# Altium PCB discovery_shield.PcbDoc (part 1 of 2)
Units mm, origin at the board's own origin, x right, y up, seen from the top; angles counter-clockwise.
Board outline 147.5 x 100.12 mm, 2 copper layers (Top Ground, Bottom Ground); 77 components, 41 nets, 312 pads, 78 vias.
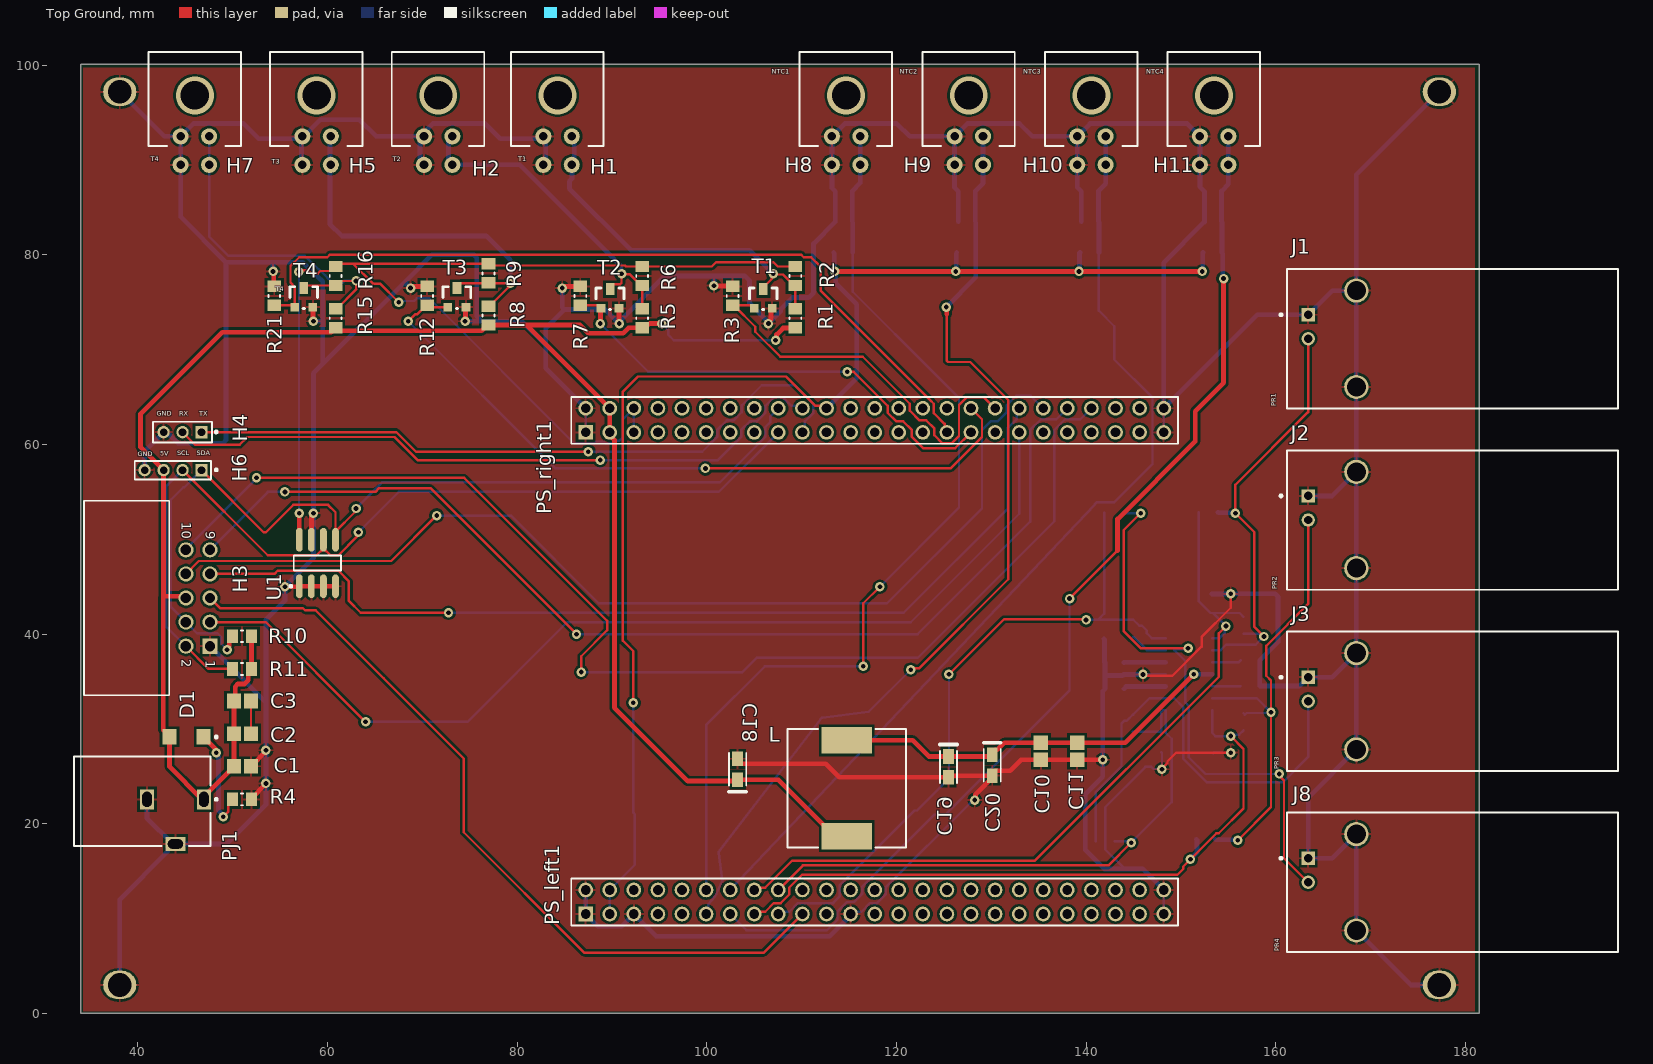
[diagram p0: Top Ground view]
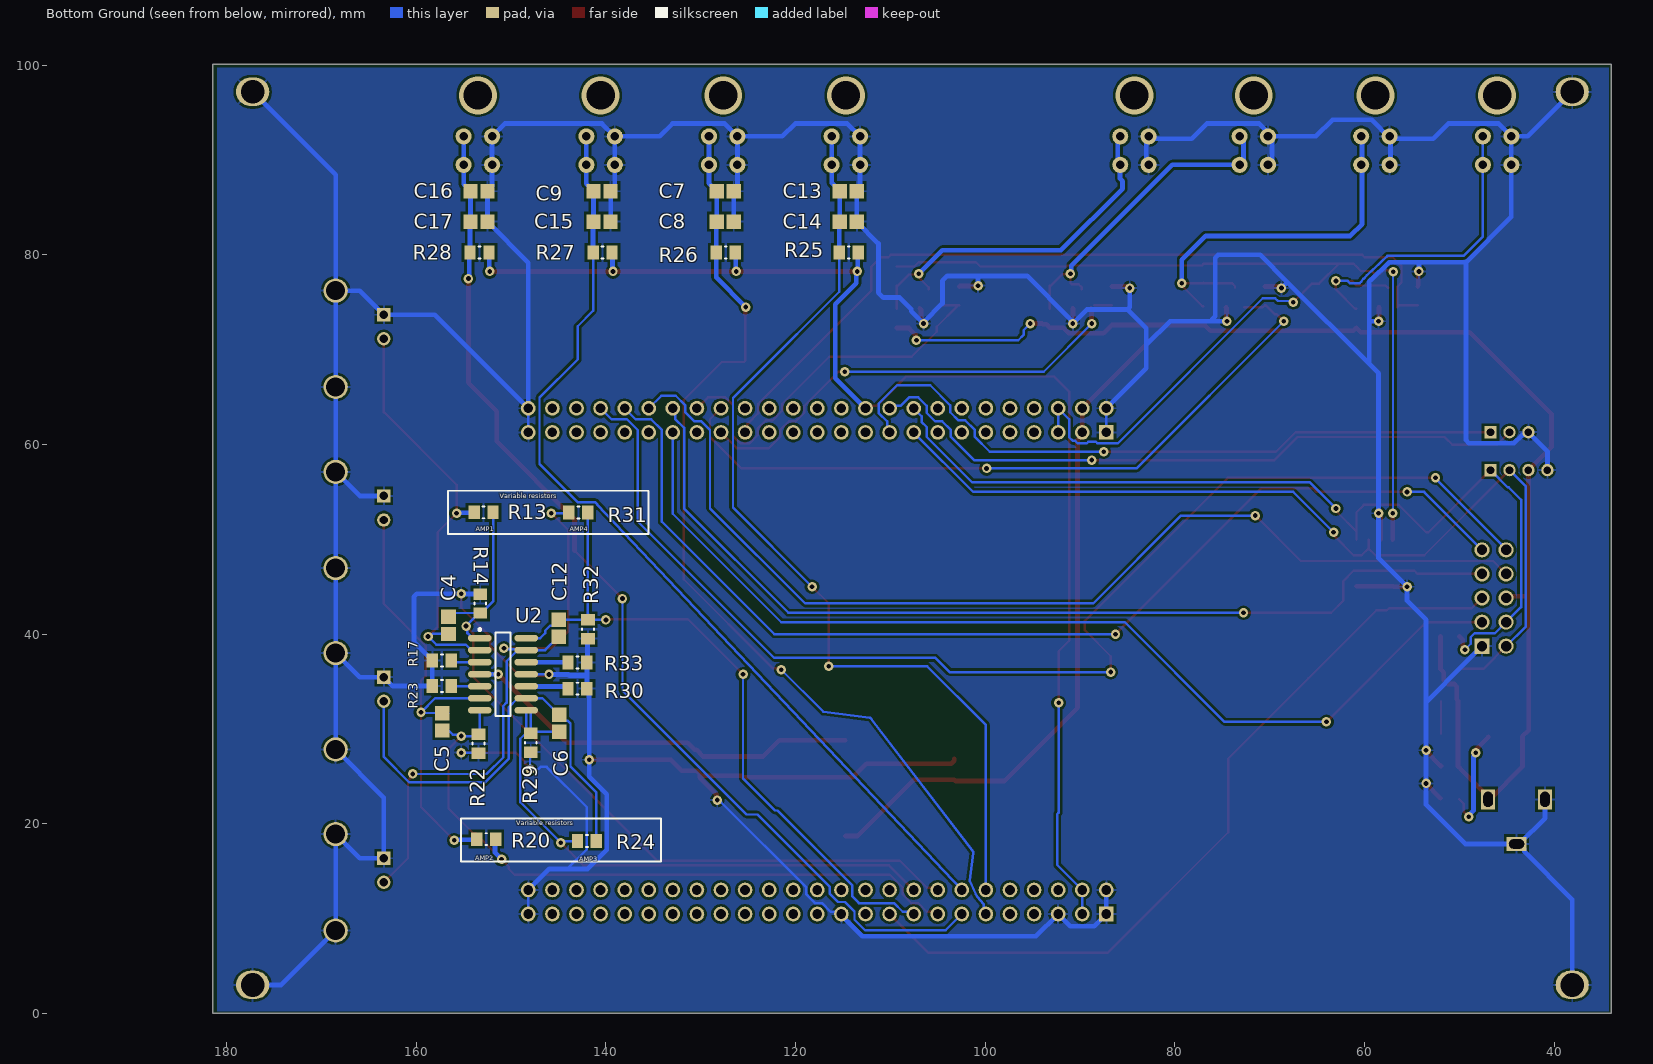
[diagram p1: Bottom Ground view, seen from below]
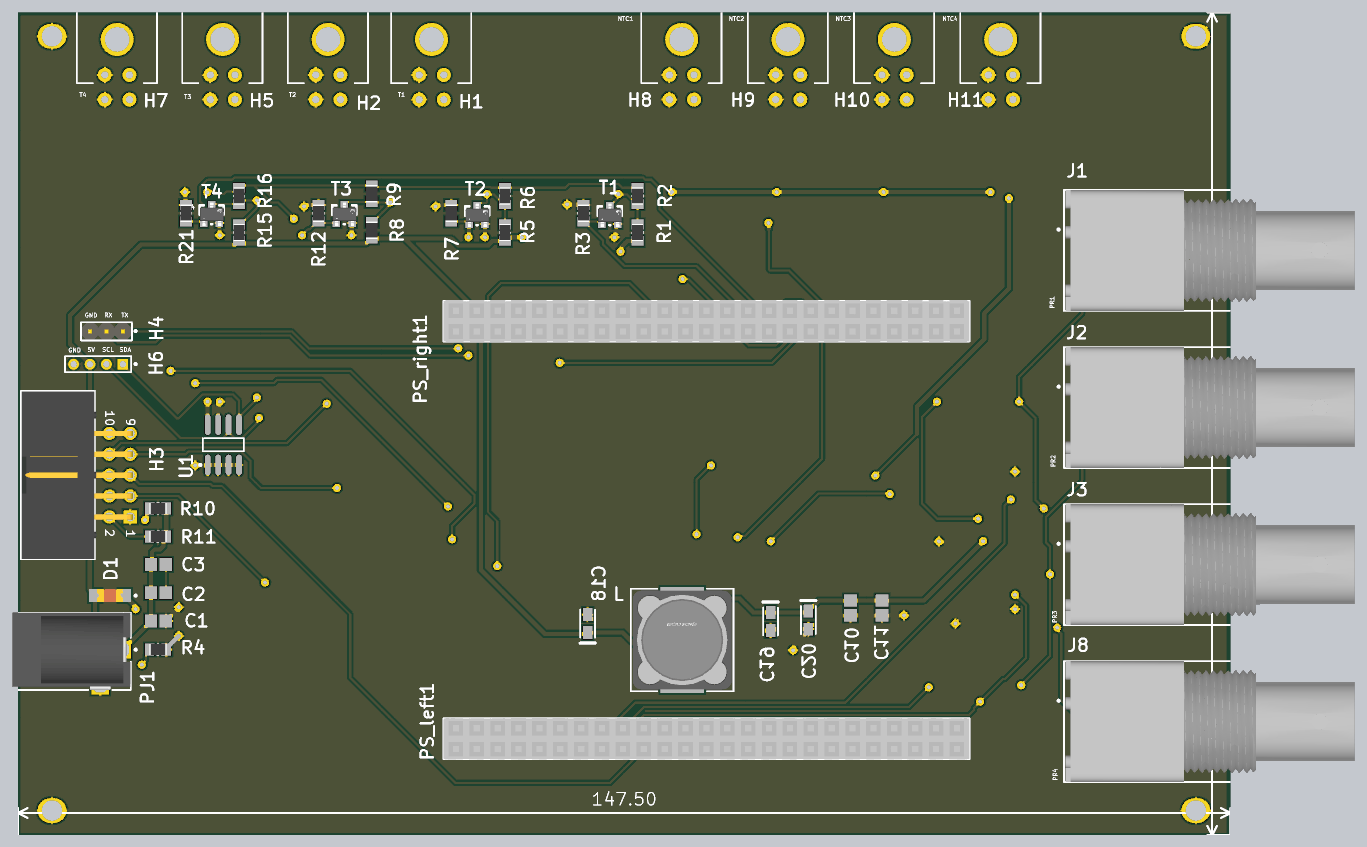
[diagram p2: 3D render of the assembled board from above, using the file's embedded part models]
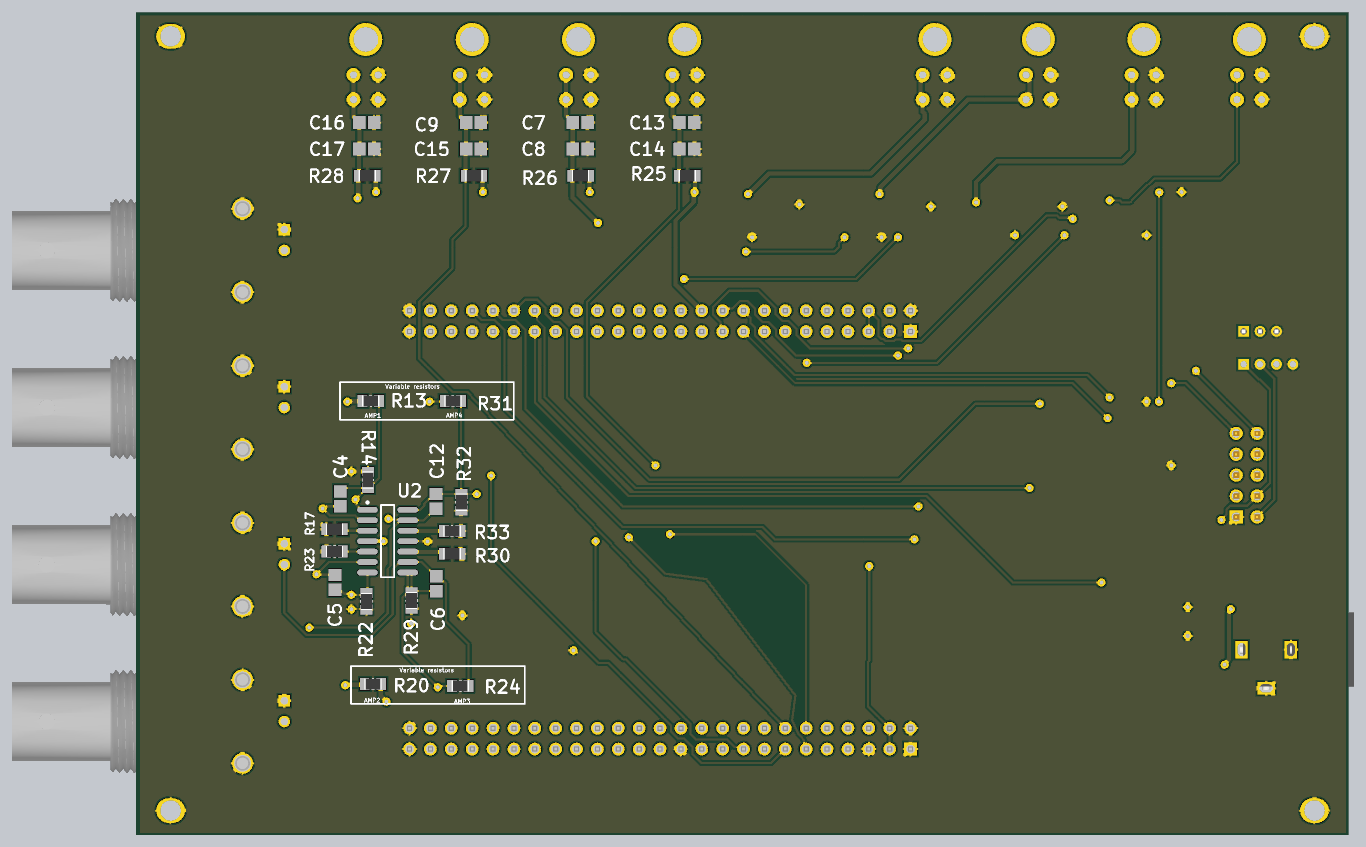
[diagram p3: 3D render of the assembled board from below, using the file's embedded part models]

## Layer stack, top to bottom
Top Solder: solder mask 0.0102, Solder Resist, Dk 3.5
Top Ground: signal copper 0.0356
Dielectric 1: dielectric 0.32, FR-4, Dk 4.8
Bottom Ground: signal copper 0.0356
Bottom Solder: solder mask 0.0102, Solder Resist, Dk 3.5

## Board outline
33.95,0 181.45,0 181.45,100.125 33.95,100.125

## Design rules (kind name [scope] priority, off if disabled: settings)
Clearance [All] p1: gap=0.254 ignorepadtopadclearanceinfootprint=FALSE except(0: Arc-Hole Track-Hole SMDPad-Hole THPad-Hole Via-Hole Fill-Hole Poly-Hole Region-Hole Text-Hole)
DiffPairsRouting [All] p1: maxlimit=0.254 minlimit=0.254 mostfreqgap=0.254 substack1={D1B1C374-4C5A-4695-9EA5-56BB1ECA9717} toplayer_{d1b1c374-4c5a-4695-9ea5-56bb1eca9717}_minwidth=0.381 toplayer_{d1b1c374-4c5a-4695-9ea5-56bb1eca9717}_maxwidth=0.381 toplayer_{d1b1c374-4c5a-4695-9ea5-56bb1eca9717}_prefwidth=0.381 bottomlayer_{d1b1c374-4c5a-4695-9ea5-56bb1eca9717}_minwidth=0.381 bottomlayer_{d1b1c374-4c5a-4695-9ea5-56bb1eca9717}_maxwidth=0.381 bottomlayer_{d1b1c374-4c5a-4695-9ea5-56bb1eca9717}_prefwidth=0.381 toplayer_minwidth=0.381 toplayer_maxwidth=0.381 toplayer_prefwidth=0.381 bottomlayer_minwidth=0.381 bottomlayer_maxwidth=0.381 bottomlayer_prefwidth=0.381 substack2={5FBC7BDE-A7E4-4D81-87A5-A691E1B52501} toplayer_{5fbc7bde-a7e4-4d81-87a5-a691e1b52501}_minwidth=0.381 toplayer_{5fbc7bde-a7e4-4d81-87a5-a691e1b52501}_maxwidth=0.381 toplayer_{5fbc7bde-a7e4-4d81-87a5-a691e1b52501}_prefwidth=0.381 bottomlayer_{5fbc7bde-a7e4-4d81-87a5-a691e1b52501}_minwidth=0.381 bottomlayer_{5fbc7bde-a7e4-4d81-87a5-a691e1b52501}_maxwidth=0.381 bottomlayer_{5fbc7bde-a7e4-4d81-87a5-a691e1b52501}_prefwidth=0.381 substack3={A1F965BF-F005-4EF8-922E-463639412966} toplayer_{a1f965bf-f005-4ef8-922e-463639412966}_minwidth=0.381 toplayer_{a1f965bf-f005-4ef8-922e-463639412966}_maxwidth=0.381 toplayer_{a1f965bf-f005-4ef8-922e-463639412966}_prefwidth=0.381 bottomlayer_{a1f965bf-f005-4ef8-922e-463639412966}_minwidth=0.381 bottomlayer_{a1f965bf-f005-4ef8-922e-463639412966}_maxwidth=0.381 bottomlayer_{a1f965bf-f005-4ef8-922e-463639412966}_prefwidth=0.381 substack4={1C97A577-5376-477D-B455-A2ED0DC39C65} toplayer_{1c97a577-5376-477d-b455-a2ed0dc39c65}_minwidth=0.381 toplayer_{1c97a577-5376-477d-b455-a2ed0dc39c65}_maxwidth=0.381 toplayer_{1c97a577-5376-477d-b455-a2ed0dc39c65}_prefwidth=0.381 bottomlayer_{1c97a577-5376-477d-b455-a2ed0dc39c65}_minwidth=0.381 bottomlayer_{1c97a577-5376-477d-b455-a2ed0dc39c65}_maxwidth=0.381 bottomlayer_{1c97a577-5376-477d-b455-a2ed0dc39c65}_prefwidth=0.381 substack5={2A62406C-F507-4D0A-A64A-133965886188} toplayer_{2a62406c-f507-4d0a-a64a-133965886188}_minwidth=0.381 toplayer_{2a62406c-f507-4d0a-a64a-133965886188}_maxwidth=0.381 toplayer_{2a62406c-f507-4d0a-a64a-133965886188}_prefwidth=0.381 bottomlayer_{2a62406c-f507-4d0a-a64a-133965886188}_minwidth=0.381 bottomlayer_{2a62406c-f507-4d0a-a64a-133965886188}_maxwidth=0.381 bottomlayer_{2a62406c-f507-4d0a-a64a-133965886188}_prefwidth=0.381 maxuncoupledlength=12.7
HoleSize [All] p1: absolutevalues=TRUE maxlimit=2.54 minlimit=0.5 maxpercent=80.000 minpercent=20.000
PolygonConnect PolygonConnect_2 [All vs IsNamedPolygon('NONET_L01_P002')] p1: thpad.connectstyle=Relief thpad.reliefconductorwidth=0.254 thpad.reliefentries=4 thpad.polygonreliefangle="45 Angle" thpad.airgapwidth=0.254 smdpad.connectstyle=Relief smdpad.reliefconductorwidth=0.254 smdpad.reliefentries=4 smdpad.polygonreliefangle="45 Angle" smdpad.airgapwidth=0.254 via.connectstyle=Relief via.reliefconductorwidth=0.254 via.reliefentries=4 via.polygonreliefangle="90 Angle" via.airgapwidth=0.254
PolygonConnect 5V [All vs IsNamedPolygon('NONET_L01_P000')] p2: thpad.connectstyle=Direct thpad.reliefconductorwidth=0.254 thpad.reliefentries=4 thpad.polygonreliefangle="90 Angle" thpad.airgapwidth=0.254 smdpad.connectstyle=Direct smdpad.reliefconductorwidth=0.254 smdpad.reliefentries=4 smdpad.polygonreliefangle="90 Angle" smdpad.airgapwidth=0.254 via.connectstyle=Relief via.reliefconductorwidth=0.254 via.reliefentries=4 via.polygonreliefangle="90 Angle" via.airgapwidth=0.254
PolygonConnect PolygonConnect_1 [All vs IsNamedPolygon('NONET_L01_P000')] p3: thpad.connectstyle=Direct thpad.reliefconductorwidth=0.254 thpad.reliefentries=4 thpad.polygonreliefangle="90 Angle" thpad.airgapwidth=0.254 smdpad.connectstyle=Direct smdpad.reliefconductorwidth=0.254 smdpad.reliefentries=4 smdpad.polygonreliefangle="90 Angle" smdpad.airgapwidth=0.254 via.connectstyle=Relief via.reliefconductorwidth=0.254 via.reliefentries=4 via.polygonreliefangle="90 Angle" via.airgapwidth=0.254
PolygonConnect [All] p4: connectstyle=Relief reliefconductorwidth=0.254 reliefentries=4 polygonreliefangle="90 Angle" airgapwidth=0.254
RoutingVias [All] p1: holewidth=0.5 width=1 viastyle="Through Hole" minholewidth=0.5 minwidth=1 maxholewidth=1 maxwidth=1.5
SolderMaskExpansion [All] p1: expansion=0.102 istentingtop=FALSE
UnRoutedNet [All] p1: checkbadconnections=TRUE
Width [All] p1: maxlimit=5 minlimit=0.254 preferedwidth=0.5 substack1={D1B1C374-4C5A-4695-9EA5-56BB1ECA9717} toplayer_{d1b1c374-4c5a-4695-9ea5-56bb1eca9717}_maxwidth=0.254 toplayer_{d1b1c374-4c5a-4695-9ea5-56bb1eca9717}_prefwidth=0.254 bottomlayer_{d1b1c374-4c5a-4695-9ea5-56bb1eca9717}_maxwidth=0.254 bottomlayer_{d1b1c374-4c5a-4695-9ea5-56bb1eca9717}_prefwidth=0.254 substack2={5FBC7BDE-A7E4-4D81-87A5-A691E1B52501} toplayer_{5fbc7bde-a7e4-4d81-87a5-a691e1b52501}_maxwidth=0.254 toplayer_{5fbc7bde-a7e4-4d81-87a5-a691e1b52501}_prefwidth=0.254 bottomlayer_{5fbc7bde-a7e4-4d81-87a5-a691e1b52501}_maxwidth=0.254 bottomlayer_{5fbc7bde-a7e4-4d81-87a5-a691e1b52501}_prefwidth=0.254 substack3={A1F965BF-F005-4EF8-922E-463639412966} toplayer_{a1f965bf-f005-4ef8-922e-463639412966}_maxwidth=0.254 toplayer_{a1f965bf-f005-4ef8-922e-463639412966}_prefwidth=0.254 bottomlayer_{a1f965bf-f005-4ef8-922e-463639412966}_maxwidth=0.254 bottomlayer_{a1f965bf-f005-4ef8-922e-463639412966}_prefwidth=0.254 substack4={1C97A577-5376-477D-B455-A2ED0DC39C65} toplayer_{1c97a577-5376-477d-b455-a2ed0dc39c65}_maxwidth=0.254 toplayer_{1c97a577-5376-477d-b455-a2ed0dc39c65}_prefwidth=0.254 bottomlayer_{1c97a577-5376-477d-b455-a2ed0dc39c65}_maxwidth=0.254 bottomlayer_{1c97a577-5376-477d-b455-a2ed0dc39c65}_prefwidth=0.254 substack5={2A62406C-F507-4D0A-A64A-133965886188} toplayer_{2a62406c-f507-4d0a-a64a-133965886188}_maxwidth=0.254 toplayer_{2a62406c-f507-4d0a-a64a-133965886188}_prefwidth=0.254 bottomlayer_{2a62406c-f507-4d0a-a64a-133965886188}_maxwidth=0.254 bottomlayer_{2a62406c-f507-4d0a-a64a-133965886188}_prefwidth=0.254 minimp=50.000000 maximp=50.000000 favimp=50.000000
27 further rules are at their usual default settings.

## Components (designator, comment, footprint, x,y, rotation, side; value= is the part's Value field where it differs from the comment)
C1 "10nF" "CHIP CAPACITOR 0805" 51.025,26.065 r180 top
C2 "10uF" "CHIP CAPACITOR 0805" 51.025,29.505 r0 top
C3 "100uF" "CHIP CAPACITOR 0805" 51.025,32.945 r0 top
C4 "100nF" "CHIP CAPACITOR 0805" 156.6,40.925 r90 bottom
C5 "100nF" "CHIP CAPACITOR 0805" 157.25,30.75 r270 bottom
C6 "100nF" "CHIP CAPACITOR 0805" 144.925,30.6 r270 bottom
C7 "0.47uF" "CHIP CAPACITOR 0805" 127.417,86.711 r0 bottom
C8 "10nF" "CHIP CAPACITOR 0805" 127.417,83.5 r0 bottom
C9 "0.47uF" "CHIP CAPACITOR 0805" 140.4,86.711 r0 bottom
C10 "0.1nF" CAP-CER-0.1nF 135.225,27.65 r90 top
C11 "0.1nF" CAP-CER-0.1nF 139.05,27.65 r90 top
C12 "100nF" "CHIP CAPACITOR 0805" 144.975,40.625 r90 bottom
C13 "0.47uF" "CHIP CAPACITOR 0805" 114.433,86.711 r0 bottom
C14 "10nF" "CHIP CAPACITOR 0805" 114.433,83.5 r0 bottom
C15 "10nF" "CHIP CAPACITOR 0805" 140.4,83.5 r0 bottom
C16 "0.47uF" "CHIP CAPACITOR 0805" 153.383,86.711 r0 bottom
C17 "10nF" "CHIP CAPACITOR 0805" 153.383,83.5 r0 bottom
C18 "22uF" TANTALUM_CAP_10uF 103.25,25.755 r90 top
C19 "10uF" TANTALUM_CAP_10uF 125.5,26 r270 top
C20 "10uF" TANTALUM_CAP_10uF 130.1,26.175 r270 top
D1 "LED_RED" "LED 0805 RED" 45.125,29.175 r180 top
H1 "Header 4Pin" "CRIMP 3mm  4 pins" 85.75,92.5 r180 top
H2 "Header 4Pin" "CRIMP 3mm  4 pins" 73.167,92.5 r180 top
H3 "AngleHeader 5X2" "AngleHeader 5X2" 38.793,43.81 r270 top
H4 "3-pin-header" Header-3-Pin 44.7,61.3 r180 top
H5 "Header 4Pin" "CRIMP 3mm  4 pins" 60.333,92.5 r180 top
H6 "Header-1x4" Header-1x4 53.21,57.59 r180 top
H7 "Header 4Pin" "CRIMP 3mm  4 pins" 47.5,92.5 r180 top
H8 "Header 4Pin" "CRIMP 3mm  4 pins" 116.187,92.5 r180 top
H9 "Header 4Pin" "CRIMP 3mm  4 pins" 129.125,92.5 r180 top
H10 "Header 4Pin" "CRIMP 3mm  4 pins" 142.062,92.5 r180 top
H11 "Header 4Pin" "CRIMP 3mm  4 pins" 155,92.5 r180 top
J1 "BNC Con" BNC_CONNECTOR_F 168.5,71.15 r270 top
J2 "BNC Con" BNC_CONNECTOR_F 168.5,52.035 r270 top
J3 "BNC Con" BNC_CONNECTOR_F 168.5,32.92 r270 top
J8 "BNC Con" BNC_CONNECTOR_F 168.5,13.825 r270 top
L "100uH" SHIELDED-INDUCTOR-SMD 114.75,23.75 r90 top
PJ1 "PWR jack" "DC SOCKET" 43.95,22.575 r180 top
PS_left1 "pin_socket_L_stm32f407-discovery" PIN_SOCKET_L_DISCOVERY 117.7,37.15 r90 top locked
PS_right1 "pin_socket_R_stm32f407-discovery" PIN_SOCKET_R_DISCOVERY 117.7,37.15 r90 top locked
R1 "10kOhm" "Chip Resistor 0805" 109.325,73.325 r270 top
R2 "10kOhm" "Chip Resistor 0805" 109.325,77.775 r90 top
R3 "10kOhm" "Chip Resistor 0805" 102.725,75.675 r270 top
R4 "100R" "Chip Resistor 0805" 50.975,22.575 r0 top
R5 "10kOhm" "Chip Resistor 0805" 93.175,73.325 r270 top
R6 "10kOhm" "Chip Resistor 0805" 93.175,77.775 r90 top
R7 "10kOhm" "Chip Resistor 0805" 86.65,75.675 r270 top
R8 "10kOhm" "Chip Resistor 0805" 76.975,73.6 r270 top
R9 "10kOhm" "Chip Resistor 0805" 76.975,78.05 r90 top
R10 "4k7R" "Chip Resistor 0805" 50.975,39.775 r180 top
R11 "4k7R" "Chip Resistor 0805" 50.975,36.335 r180 top
R12 "10kOhm" "Chip Resistor 0805" 70.5,75.675 r270 top
R13 "100R" "Chip Resistor 0805" 152.9,52.85 r180 bottom
R14 "4k7R" "Chip Resistor 0805" 153.25,43.225 r270 bottom
R15 "10kOhm" "Chip Resistor 0805" 60.85,73.325 r270 top
R16 "10kOhm" "Chip Resistor 0805" 60.85,77.775 r90 top
R17 "620R" "Chip Resistor 0805" 157.3,37.225 r180 bottom
R20 "100R" "Chip Resistor 0805" 152.625,18.375 r180 bottom
R21 "10kOhm" "Chip Resistor 0805" 54.375,75.675 r270 top
R22 "4k7R" "Chip Resistor 0805" 153.425,28.45 r90 bottom
R23 "620R" "Chip Resistor 0805" 157.3,34.525 r180 bottom
R24 "100R" "Chip Resistor 0805" 142,18.175 r0 bottom
R25 "10kOhm" "Chip Resistor 0805" 114.383,80.239 r180 bottom
R26 "10kOhm" "Chip Resistor 0805" 127.367,80.239 r180 bottom
R27 "10kOhm" "Chip Resistor 0805" 140.35,80.239 r180 bottom
R28 "10kOhm" "Chip Resistor 0805" 153.333,80.239 r180 bottom
R29 "4k7R" "Chip Resistor 0805" 147.925,28.55 r90 bottom
R30 "620R" "Chip Resistor 0805" 143,34.25 r0 bottom
R31 "100R" "Chip Resistor 0805" 142.9,52.825 r180 bottom
R32 "4k7R" "Chip Resistor 0805" 141.875,40.525 r90 bottom
R33 "620R" "Chip Resistor 0805" 143,37 r0 bottom
T1 "MOSFET N-CH" "MOSFET N-CH" 106.025,75.3 r90 top
T2 "MOSFET N-CH" "MOSFET N-CH" 89.875,75.3 r90 top
T3 "MOSFET N-CH" "MOSFET N-CH" 73.725,75.422 r90 top
T4 "MOSFET N-CH" "MOSFET N-CH" 57.575,75.422 r90 top
U1 "24AA01-I/SN" "EEPROM CHIP" 58.925,47.5 r90 top
U2 "AD8040" AD8040 150.85,35.775 r180 bottom

## Footprints (in the part's own frame and the unit in brackets; to place one, negate y for a bottom-side part, rotate by r counter-clockwise, add the part's x,y. Pads: shape width x height; smd on the part's side, far side on the other; paste and mask are expansions set on the pad)
AD8040 [mm] "SOIC, 14-Leads, Body 8.65x3.9mm, Pitch 1.27mm, IPC Low Density"
  oval 2.5x0.7 smd: 1(-2.45,3.81) 2(-2.45,2.54) 3(-2.45,1.27) 4(-2.45,0) 5(-2.45,-1.27) 6(-2.45,-2.54) 7(-2.45,-3.81) 8(2.45,-3.81) 9(2.45,-2.54) 10(2.45,-1.27) 11(2.45,0) 12(2.45,1.27) 13(2.45,2.54) 14(2.45,3.81)
  silkscreen extent -2.58,-4.4 0.8,4.83, body extent -2,-4.4 2,4.4, height 1.75
"AngleHeader 5X2" [mm] "10 pins, right angled, gold plating"
  rect 1.6x1.6 hole 1.1: 1(5.08,8.805)
  round 1.6 hole 1.1: 2(5.08,6.265) 3(2.54,8.805) 4(2.54,6.265) 5(0,8.805) 6(0,6.265) 7(-2.54,8.805) 8(-2.54,6.265) 9(-5.08,8.805) 10(-5.08,6.265)
  silkscreen extent -10.26,-4.5 10.26,4.5, body extent -10.18,-4.42 10.18,9.13, height 9.23
BNC_CONNECTOR_F [mm] "SMD, 2-Leads, Body 34.9x14.7mm, Pitch 2.54mm"
  rect 1.4x1.4 hole 0.89: 1(-2.54,-5.08)
  round 1.4 hole 0.89: 2(0,-5.08)
  round 2.55 hole 2.01: MH1(-5.08,0) MH2(5.08,0)
  silkscreen extent -7.35,-8.07 7.35,27.6, body extent -7.35,-7.1 7.35,28.05, height 15.8
CAP-CER-0.1nF [mm] "Chip Capacitor, 2-Leads, Body 2.00x1.25mm, IPC Low Density"
  rect 1.5x1.55 smd: 1(-0.9,0) 2(0.9,0)
  body extent -1.1,-0.72 1.1,0.72, height 1.4
"CHIP CAPACITOR 0805" [mm] "Chip Capacitor, 2-Leads, Body 2.00x1.25mm, IPC Low Density"
  rect 1.5x1.55 smd: 1(-0.9,0) 2(0.9,0)
  body extent -1.1,-0.72 1.1,0.72, height 0.88
"Chip Resistor 0805" [mm] "Chip Resistor, 2-Leads, Body 2.1x1.35mm, IPC Low Density"
  rect 1.2x1.45 smd: 1(-1,0) 2(1,0)
  silkscreen extent -0.1,-0.63 0.1,0.63, body extent -1.05,-0.68 1.05,0.67, height 0.6
"CRIMP 3mm  4 pins" [mm]
  round 1.7 hole 0.9: 1(0,3) 2(0,0) 3(3,3) 4(3,0)
  silkscreen extent -3.35,-8.9 6.4,1
"DC SOCKET" [mm] "THD, 3-Leads, Body 14.4x9mm, Height 11mm"
  rect 1.5x2.1 hole 1 slot 1.6 at 90 deg: 1(-3,0) 2(3,0)
  rect 2.1x1.5 hole 1 slot 1.6 at 0 deg: 3(0,4.7)
  silkscreen extent -4.43,-4.5 10.7,4.9, body extent -3.7,-4.5 10.7,4.9, height 11
"EEPROM CHIP" [mm] "SOIC, 8-Leads, Body 4.9x3.9mm, Pitch 1.27mm, IPC Low Density"
  oval 2.5x0.7 smd: 1(-2.45,1.905) 2(-2.45,0.635) 3(-2.45,-0.635) 4(-2.45,-1.905) 5(2.45,-1.905) 6(2.45,-0.635) 7(2.45,0.635) 8(2.45,1.905)
  silkscreen extent -2.57,-2.5 0.8,2.93, body extent -2,-2.5 2,2.5, height 1.75
Header-1x4 [mm]
  rect 1.3x1.3 hole 0.8 paste-1000 mask+0: 1(6.51,0.29)
  round 1.3 hole 0.8 paste-1000 mask+0: 2(8.51,0.29) 3(10.51,0.29) 4(12.51,0.29)
  silkscreen extent 4.83,-0.69 13.55,1.27
Header-3-Pin [mm]
  rect 1.3x1.3 hole 0.8 paste-1000 mask+0: 1(-2,0)
  round 1.3 hole 0.8 paste-1000 mask+0: 2(0,0) 3(2,0)
  silkscreen extent -3.68,-1.1 3.1,1.1, body extent -3.2,-1.2 3.2,1.2, height 0.25
"LED 0805 RED" [mm]
  rect 1.5x1.6 smd paste+0 mask+0: 1(-1.8,0) 2(1.8,0)
  silkscreen extent -3.25,-0.1 -3,0.15, body extent -2.65,-0.95 2.65,0.95, height 0.25
"MOSFET N-CH" [mil]
  rect 36x36 smd: 1(-37.01,40.94) 2(-37.01,-34.06)
  rect 50x36 smd: 3(42.99,2.94)
  silkscreen extent -42,-54 48,61, body extent -62,-68 72,72, height 10
PIN_SOCKET_L_DISCOVERY [mm]
  rect 1.55x1.55 hole 1.02: 1(-26.67,30.48)
  round 1.55 hole 1.02: 2(-24.13,30.48) 3(-26.67,27.94) 4(-24.13,27.94) 5(-26.67,25.4) 6(-24.13,25.4) 7(-26.67,22.86) 8(-24.13,22.86) 9(-26.67,20.32) 10(-24.13,20.32) 11(-26.67,17.78) 12(-24.13,17.78) 13(-26.67,15.24) 14(-24.13,15.24) 15(-26.67,12.7) 16(-24.13,12.7) 17(-26.67,10.16) 18(-24.13,10.16) 19(-26.67,7.62) 20(-24.13,7.62) 21(-26.67,5.08) 22(-24.13,5.08) 23(-26.67,2.54) 24(-24.13,2.54) 25(-26.67,0) 26(-24.13,0) 27(-26.67,-2.54) 28(-24.13,-2.54) 29(-26.67,-5.08) 30(-24.13,-5.08) 31(-26.67,-7.62) 32(-24.13,-7.62) 33(-26.67,-10.16) 34(-24.13,-10.16) 35(-26.67,-12.7) 36(-24.13,-12.7) 37(-26.67,-15.24) 38(-24.13,-15.24) 39(-26.67,-17.78) 40(-24.13,-17.78) 41(-26.67,-20.32) 42(-24.13,-20.32) 43(-26.67,-22.86) 44(-24.13,-22.86) 45(-26.67,-25.4) 46(-24.13,-25.4) 47(-26.67,-27.94) 48(-24.13,-27.94) 49(-26.67,-30.48) 50(-24.13,-30.48)
  silkscreen extent -27.87,-32.01 -22.93,32.01, body extent -27.94,-32 -22.86,32.01, height 11.05
PIN_SOCKET_R_DISCOVERY [mm]
  rect 1.55x1.55 hole 1.02: 1(24.13,30.48)
  round 1.55 hole 1.02: 2(26.67,30.48) 3(24.13,27.94) 4(26.67,27.94) 5(24.13,25.4) 6(26.67,25.4) 7(24.13,22.86) 8(26.67,22.86) 9(24.13,20.32) 10(26.67,20.32) 11(24.13,17.78) 12(26.67,17.78) 13(24.13,15.24) 14(26.67,15.24) 15(24.13,12.7) 16(26.67,12.7) 17(24.13,10.16) 18(26.67,10.16) 19(24.13,7.62) 20(26.67,7.62) 21(24.13,5.08) 22(26.67,5.08) 23(24.13,2.54) 24(26.67,2.54) 25(24.13,0) 26(26.67,0) 27(24.13,-2.54) 28(26.67,-2.54) 29(24.13,-5.08) 30(26.67,-5.08) 31(24.13,-7.62) 32(26.67,-7.62) 33(24.13,-10.16) 34(26.67,-10.16) 35(24.13,-12.7) 36(26.67,-12.7) 37(24.13,-15.24) 38(26.67,-15.24) 39(24.13,-17.78) 40(26.67,-17.78) 41(24.13,-20.32) 42(26.67,-20.32) 43(24.13,-22.86) 44(26.67,-22.86) 45(24.13,-25.4) 46(26.67,-25.4) 47(24.13,-27.94) 48(26.67,-27.94) 49(24.13,-30.48) 50(26.67,-30.48)
  silkscreen extent 22.93,-32.01 27.87,32.01, body extent 22.86,-32 27.94,32.01, height 11.05
SHIELDED-INDUCTOR-SMD [mm] "100uH, FP-SRR1210-MFG"
  rect 2.8x5.3 smd paste+0 mask+0: 1(-5.05,0) 2(5.05,0)
  silkscreen extent -6.25,-6.25 6.25,6.25, body extent -6.55,-6.35 6.55,6.35, height 0.25
TANTALUM_CAP_10uF [mm] "Molded TAN Capacitor, 2-Leads, Body 3.4x1.8mm, IPC High Density"
  rect 1.55x1.15 smd: 1(-1.1,0) 2(1.1,0)
  silkscreen extent -2.37,-0.9 1.7,0.9, body extent -1.7,-0.9 1.7,0.9, height 1.8

## Part data
C1 C8 C14 C15 C17: library part Cap_0805_10nF, Manufacturer=Kemet, Part Number=C0805C103K5RACTU
C2: library part Cap_0805_10uF, "Cap 0805 10uF", Manufacturer=Kemet, Part Number=C0805C106K8PACTU
C3: library part Cap_0805_100uF, "Chip Capacitor, 100 uF, +/- 20%, 6.3 V, -55 to 85 degC, 0805 (2012 Metric), RoHS, Tape and Reel", Case Code (Imperial)=0805, Case Code (Metric)=2012, Dielectric=X5R, Manufacturer=Murata, Max Operating Temperature=85degC, Min Operating Temperature=-55degC, Package Description="2-Pin Surface Mount Device, Body 2 x 1.25 mm", Package Reference=805, Tolerance=20%, Voltage Rating=6.3V, Capacitance=100uF, Case/Package=0805, Datasheet URL=http://search.murata.co.jp/Ceramy/image/img/A01X/G101/ENG/GRM21BR60J107ME15-01.pdf, Datasheet Version=03/2016, Lead Free=LeadFree, Length=0.079inch, Manufacturer URL=http://www.murata.com/, Mount=SurfaceMount, Mounting Technology=SurfaceMount, Packaging=CutTape, REACH SVHC=NoSVHC, RoHSCompliant=True, Thickness=0.057inch, Voltage Rating (DC)=6.3V, Width=0.049inch
C4 C5 C6 C12: library part Cap_0805_100nF, "YAGEO - CC0805KRX7R7BB104 - SMD Multilayer Ceramic Capacitor, 0.1 µF, 16 V, 0805 [2012 Metric], ± 10%, X7R, CC Series", Case Code (Imperial)=0805, Case Code (Metric)=2012, Dielectric=X7R, Insulation Resistance=100GR, Manufacturer=Yageo, Manufacturer Part Number=CC0805KRX7R7BB104, Max Operating Temperature=125°C, Min Operating Temperature=-55°C, Package Quantity=1, Resistor Type=Ceramic, Supplier Part Number 1=311-1142-1-ND, Tolerance=10%, Voltage=16V, Capacitance=100nF, Case/Package=0805, Category="Ceramic Capacitors", ComponentLink1Description=https://datasheet.ciiva.com/8034/1784427-8034017.pdf?src-supplier=Element14, ComponentLink1URL=https://datasheet.ciiva.com/8034/1784427-8034017.pdf?src-supplier=Element14, ComponentLink2Description=https://datasheet.ciiva.com/11786/0900766b80d84f1d-11786102.pdf?src-supplier=RSComponents, ComponentLink2URL=https://datasheet.ciiva.com/11786/0900766b80d84f1d-11786102.pdf?src-supplier=RSComponents, ComponentLink3Description=https://datasheet.ciiva.com/15189/getdatasheetpartid-314877-15189221.pdf?src-supplier=Verical, ComponentLink3URL=https://datasheet.ciiva.com/15189/getdatasheetpartid-314877-15189221.pdf?src-supplier=Verical, ComponentLink4Description=https://datasheet.ciiva.com/144/mlccorderingcode-144998.pdf?src-supplier=Digi-Key, ComponentLink4URL=https://datasheet.ciiva.com/144/mlccorderingcode-144998.pdf?src-supplier=Digi-Key, ComponentLink5Description=https://datasheet.ciiva.com/144/mlccorderingcode-144999.pdf?src-supplier=Digi-Key, ComponentLink5URL=https://datasheet.ciiva.com/144/mlccorderingcode-144999.pdf?src-supplier=Digi-Key, ComponentLink6Description=https://datasheet.ciiva.com/145/mlccorderingcode-145000.pdf?src-supplier=Digi-Key, ComponentLink6URL=https://datasheet.ciiva.com/145/mlccorderingcode-145000.pdf?src-supplier=Digi-Key, ComponentLink7Description=https://datasheet.ciiva.com/11465/upy-gphc-x7r-6-3v-to-50v-8-11465289.pdf?src-supplier=Avnet, ComponentLink7URL=https://datasheet.ciiva.com/11465/upy-gphc-x7r-6-3v-to-50v-8-11465289.pdf?src-supplier=Avnet, ComponentLink8Description=https://datasheet.ciiva.com/17436/upy-gphc-x7r-6-3v-to-50v-8-17436617.pdf?src-supplier=Avnet+Europe, ComponentLink8URL=https://datasheet.ciiva.com/17436/upy-gphc-x7r-6-3v-to-50v-8-17436617.pdf?src-supplier=Avnet+Europe, ComponentLink9Description=https://datasheet.ciiva.com/7978/1489800-7978204.pdf?src-supplier=Element14, ComponentLink9URL=https://datasheet.ciiva.com/7978/1489800-7978204.pdf?src-supplier=Element14, ComponentLink10Description=https://datasheet.ciiva.com/8034/1784427-8034015.pdf?src-supplier=Element14, ComponentLink10URL=https://datasheet.ciiva.com/8034/1784427-8034015.pdf?src-supplier=Element14, Depth=1.25mm, Halogen Free="Halogen Free", Height=0.85mm, Lead Free="Lead Free", Length=2mm, Mount="Surface Mount", Number of Pins=2, Packaging="Tape and Reel", Pricing 1="1=0,12000, 10=0,08500, 50=0,04820, 100=0,03990, 500=0,02794, 1000=0,02314 (USD)", Radiation Hardening=No, REACH SVHC="No SVHC", RoHS=Yes, Stock 1=223308, Supplier 1=Digi-Key, Termination=SMD/SMT, Thickness=0.033inch, Voltage Rating=16V, Voltage Rating (DC)=16V, Width=0.049inch
C7 C9 C13 C16: library part Cap_0805_0.47uF, "Multilayer Ceramic Capacitors MLCC - SMD/SMT 10volts 0.47uF X7R 10%", Capacitance=470nF, Case Code (Imperial)=0805, Case Code (Metric)=2012, Dielectric=X7R, Dielectric Material=Ceramic, Manufacturer=KEMET, Manufacturer Part Number=C0805C474K8RACTU, Max Operating Temperature=125°C, Min Operating Temperature=-55°C, Package Quantity=1, Supplier Part Number 1=399-9247-1-ND, Tolerance=10%, Voltage Rating=10V, Case/Package=0805, Category="Ceramic Capacitors", ComponentLink1Description=http://www.mouser.com/ds/2/212/KEM_C1002_X7R_SMD-1102033.pdf?src-supplier=Mouser, ComponentLink1URL=http://www.mouser.com/ds/2/212/KEM_C1002_X7R_SMD-1102033.pdf?src-supplier=Mouser, ComponentLink2Description=http://components.arrow.com/part/dataview/0323_00331026?src-supplier=Arrow+Europe, ComponentLink2URL=http://components.arrow.com/part/dataview/0323_00331026?src-supplier=Arrow+Europe, ComponentLink3Description=https://api.kemet.com/component-edge/download/datasheet/C0805C474K8RACTU.pdf?src-supplier=Digi-Key, ComponentLink3URL=https://api.kemet.com/component-edge/download/datasheet/C0805C474K8RACTU.pdf?src-supplier=Digi-Key, ComponentLink4Description=https://search.kemet.com/component-edge/download/datasheet/C0805C474K8RACTU.pdf?src-supplier=Digi-Key, ComponentLink4URL=https://search.kemet.com/component-edge/download/datasheet/C0805C474K8RACTU.pdf?src-supplier=Digi-Key, ComponentLink5Description=http://capacitoredge.kemet.com/capedge2/DataSheet?pn=C0805C474K8RACTU&src-supplier=Avnet, ComponentLink5URL=http://capacitoredge.kemet.com/capedge2/DataSheet?pn=C0805C474K8RACTU&src-supplier=Avnet, ComponentLink6Description=http://components.arrow.com/part/dataview/2092505S3976494N7429?src-supplier=Arrow, ComponentLink6URL=http://components.arrow.com/part/dataview/2092505S3976494N7429?src-supplier=Arrow, Depth=1.25mm, Height=0.9mm, Length=2mm, Mount="Surface Mount", Packaging="Tape and Reel", Pricing 1="1=0,20000, 10=0,13600, 50=0,08160, 100=0,06900, 500=0,04720, 1000=0,04175 (USD)", Radiation Hardening=No, REACH SVHC="No SVHC", RoHS=Yes, Stock 1=149446, Supplier 1=Digi-Key, Termination=SMD/SMT, Thickness=0.055inch, Voltage Rating (DC)=10V, Weight=0.000194oz, Width=0.049inch
C10 C11: "CERAMIC CAPACITOR 100PF 200V, C0G, 10%, 0805, FULL REEL; Product Range:-; Capacitance:100pF; Capacitance Tolerance: 10%; Dielectric Characteristic:C0G / NP0; Voltage Rating:200V; Ceramic Capacitor Case:0805 [2012 Metric] ;RoHS Compliant: Yes", Capacitance=100pF, Case Code (Imperial)=0805, Case Code (Metric)=2012, Dielectric=C0G, Manufacturer="Kyocera AVX", Manufacturer Part Number=08052A101KAT2A, Max Operating Temperature=125°C, Min Operating Temperature=-55°C, Package Quantity=12000, Supplier Part Number 1=478-08052A101KAT2ACT-ND, Tolerance=10%, Voltage Rating=200V, Case/Package=0805, Category="Ceramic Capacitors", ComponentLink1Description=https://datasheet.ciiva.com/206/ccog-206194.pdf?src-supplier=Digi-Key, ComponentLink1URL=https://datasheet.ciiva.com/206/ccog-206194.pdf?src-supplier=Digi-Key, ComponentLink2Description=https://datasheet.ciiva.com/5424/ccog-243403-5424072.pdf?src-supplier=Mouser, ComponentLink2URL=https://datasheet.ciiva.com/5424/ccog-243403-5424072.pdf?src-supplier=Mouser, Depth=1.25mm, Dissipation Factor=10%, Height=0.94mm, Length=2.01mm, Mount="Surface Mount", Number of Pins=2, Packaging="Tape and Reel", Pricing 1="1=0,17000, 10=0,12200, 50=0,06940, 100=0,05740, 500=0,04026, 1000=0,03333 (USD)", Radiation Hardening=No, RoHS=Yes, Stock 1=19500, Supplier 1=Digi-Key, Termination=SMD/SMT, Thickness=0.037inch, Voltage Rating (DC)=200V, Width=0.049inch
C18: library part 10uF_Tantalum_Cap, "CAPACITOR, CASE A, 10UF, 10V; Product Range:KEMET - T491 Series; Capacitance:10µF; Capacitance Tolerance:± 10%; Voltage Rating:10V; Capacitor Case Style:1206 [3216 Metric]; Manufacturer Size Code:A; Operating Temperature Max:125°C; ;RoHS Compliant: Yes", Capacitance=10uF, Case Code (Imperial)=1206, Case Code (Metric)=3216, Dielectric Material=Tantalum, ESR (Equivalent Series Resistance)=4R, Leakage Current=1uA, Manufacturer=KEMET, Manufacturer Part Number=T491A106K010AT, Max Operating Temperature=125°C, Min Operating Temperature=-55°C, Package Quantity=2000, Ripple Current=137mA, Supplier Part Number 1=399-3684-1-ND, Tolerance=10%, Voltage=10V, Case/Package=1206, Category="Tantalum Capacitors", Depth=1.6mm, Dissipation Factor=6%, Features="General Purpose", Height=1.6mm, Height - Seated (Max)=0.071inch, Lead Free="Lead Free", Length=3.2mm, Life (Hours)=2000Hour, Mount="Surface Mount,PCB", Packaging="Tape and Reel", Polarity=Polar, Pricing 1="1=0.37000, 10=0.25400, 50=0.17760, 100=0.15230, 500=0.11420, 1000=0.09644 (USD)", REACH SVHC="No SVHC", RoHS=Yes, RoHS Compliant=Yes, Stock 1=2242457, Supplier 1=Digi-Key, Termination=SMD/SMT, Voltage Rating=10V, Voltage Rating (DC)=10V, Width=0.063inch
C19 C20: library part 10uF_Tantalum_Cap, "CAPACITOR, CASE A, 10UF, 10V; Product Range:KEMET - T491 Series; Capacitance:10µF; Capacitance Tolerance:± 10%; Voltage Rating:10V; Capacitor Case Style:1206 [3216 Metric]; Manufacturer Size Code:A; Operating Temperature Max:125°C; ;RoHS Compliant: Yes", Case Code (Imperial)=1206, Case Code (Metric)=3216, Dielectric Material=Tantalum, ESR (Equivalent Series Resistance)=4R, Leakage Current=1uA, Manufacturer=KEMET, Manufacturer Part Number=T491A106K010AT, Max Operating Temperature=125°C, Min Operating Temperature=-55°C, Package Quantity=2000, Ripple Current=137mA, Supplier Part Number 1=399-3684-1-ND, Tolerance=10%, Voltage=10V, Capacitance=10uF, Case/Package=1206, Category="Tantalum Capacitors", Depth=1.6mm, Dissipation Factor=6%, Features="General Purpose", Height=1.6mm, Height - Seated (Max)=0.071inch, Lead Free="Lead Free", Length=3.2mm, Life (Hours)=2000Hour, Mount="Surface Mount,PCB", Packaging="Tape and Reel", Polarity=Polar, Pricing 1="1=0.37000, 10=0.25400, 50=0.17760, 100=0.15230, 500=0.11420, 1000=0.09644 (USD)", REACH SVHC="No SVHC", RoHS=Yes, RoHS Compliant=Yes, Stock 1=2242457, Supplier 1=Digi-Key, Termination=SMD/SMT, Voltage Rating=10V, Voltage Rating (DC)=10V, Width=0.063inch
D1: library part "LED RED", "LED RED CLEAR CHIP SMD", Case Code (Imperial)=1206, Case Code (Metric)=3216, Color=Red, Forward Current=30mA, Forward Voltage=2V, Lens Color=Colorless, Max Operating Temperature=85°C, Min Operating Temperature=-55°C, Package Quantity=1, Power Dissipation=100mW, Reverse Voltage=5V, Test Current=10mA, Case/Package=1206, Depth=1.6mm, Dominant Wavelength=621nm, Height=1.1mm, Illumination Color=Red, Lead Free="Lead Free", Length=3.2mm, Lens Style=Diffused, Lens Transparency=Clear, Luminous Intensity=6mcd, Mount="Surface Mount", Number of Elements=1, Number of LEDs=1, Number of Pins=2, Packaging="Tape and Reel", Power Rating=100mW, Radiation Hardening=No, Viewing Angle=130°, Wavelength=630nm, Width=1.6mm
H1 H2 H5 H7 H8 H9 H10 H11: library part "CRIMP 3mm 4PIN"
H4: library part Header-1x3, "CONN HEADER VERT 3POS 2MM", Color=Black, Contact Resistance=20mR, Current Rating=1A, Manufacturer=3M, Manufacturer Part Number=951103-8622-AR, Max Operating Temperature=105°C, Min Operating Temperature=-25°C, Package Quantity=3000, Supplier Part Number 1=3M156413-03-ND, Voltage Rating=1kV, Category="Headers and Wire Housings", ComponentLink1Description=https://datasheet.ciiva.com/730/ts2156-730432.pdf?src-supplier=Digi-Key, ComponentLink1URL=https://datasheet.ciiva.com/730/ts2156-730432.pdf?src-supplier=Digi-Key, ComponentLink2Description=https://datasheet.ciiva.com/14622/70237750-14622743.pdf?src-supplier=Allied+Electronics, ComponentLink2URL=https://datasheet.ciiva.com/14622/70237750-14622743.pdf?src-supplier=Allied+Electronics, ComponentLink3Description=https://datasheet.ciiva.com/7997/ts2156-7997244.pdf?src-supplier=Element14, ComponentLink3URL=https://datasheet.ciiva.com/7997/ts2156-7997244.pdf?src-supplier=Element14, Connector Type="Male Pin", Contact Gender=Male, Contact Material="Copper Alloy,Copper", Contact Mating Length=0.173inch, Contact Plating=Gold, Contact Post Length=2.8mm, Depth=2mm, Gender=Male, Housing Color=Black, Housing Material=Thermoplastic, Length=6mm, Max Current Rating=1A, Mount="Through Hole", Number of Contacts=3, Number of Positions=3, Number of Rows=1, Orientation=Straight, Packaging=Bulk, Pitch=2mm, Pricing 1="1=0,29000, 10=0,27500, 25=0,23560, 50=0,20020, 100=0,19230, 250=0,17264, 500=0,16480 (USD)", REACH SVHC=Unknown, RoHS=Yes, Stock 1=1610, Supplier 1=Digi-Key, Termination=Solder
J1 J2 J3 J8: library part BNC_Female, "Female Connector, Pitch 2.54 mm, 1 x 2 Position, Height 15.8 mm, Tail Length 3.8 mm,  / -55 to 85 degC, RoHS, Bulk", Frequency Max=4GHz, Manufacturer="TE Connectivity", Package Description="Female Connector, Pitch 2.54 mm, 1 x 2 Position, Height 15.8 mm, Tail Length 3.8 mm", Package Reference=1-1337543-0, Coaxial Cable Types=-, Coaxial Termination=Solder, Connector Body Style=RightAngleJack, Connector Mounting=PCBMount, Connector Type=BNCCoaxial, Contact Material=Brass, Contact Plating=GoldPlatedContacts, Datasheet URL=http://www.te.com/commerce/DocumentDelivery/DDEController?Action=showdoc&DocId=Customer+Drawing%7F1337543%7FG%7Fpdf%7FEnglish%7FENG_CD_1337543_G.pdf%7F1-1337543-0, Datasheet Version="Rev. G, 12/2012", Impedance=50ohm, Manufacturer URL=http://www.te.com/, Mounting Technology=ThroughHole, Product Range=-, SVHC=ToBeAdvised
L: library part Shielded_Inductor_SMD, "BOURNS         SRR1210-680M.             INDUCTOR, SHIELDED, 100UH, 2.7A, SMD", Case/Package=1210, Current Rating=3A, DC Resistance (DCR)=102mR, Inductance Tolerance=20%, Manufacturer=Bourns, Manufacturer Part Number=SRR1210-680M, Max Operating Temperature=125°C, Min Operating Temperature=-40°C, Package Quantity=250, Resistor Type=Wirewound, Saturation Current=2.7A, Self Resonant Frequency=3.8MHz, Supplier Part Number 1=SRR1210-680MCT-ND, Test Frequency=100kHz, Category="Fixed Inductors", ComponentLink1Description=https://datasheet.ciiva.com/11799/0900766b80f2b72a-11799858.pdf?src-supplier=RSComponents, ComponentLink1URL=https://datasheet.ciiva.com/11799/0900766b80f2b72a-11799858.pdf?src-supplier=RSComponents, ComponentLink2Description=https://datasheet.ciiva.com/48684/srr1210-48684857.pdf?src-supplier=Avnet, ComponentLink2URL=https://datasheet.ciiva.com/48684/srr1210-48684857.pdf?src-supplier=Avnet, ComponentLink3Description=https://datasheet.ciiva.com/17285/srr1210-17285962.pdf?src-supplier=Avnet+Europe, ComponentLink3URL=https://datasheet.ciiva.com/17285/srr1210-17285962.pdf?src-supplier=Avnet+Europe, ComponentLink4Description=https://datasheet.ciiva.com/6697/srr1210-6697611.pdf?src-supplier=Digi-Key, ComponentLink4URL=https://datasheet.ciiva.com/6697/srr1210-6697611.pdf?src-supplier=Digi-Key, ComponentLink5Description=https://datasheet.ciiva.com/46437/1430851-46437356.pdf?src-supplier=Element14, ComponentLink5URL=https://datasheet.ciiva.com/46437/1430851-46437356.pdf?src-supplier=Element14, ComponentLink6Description=https://datasheet.ciiva.com/6697/srr1210-6697613.pdf?src-supplier=Digi-Key, ComponentLink6URL=https://datasheet.ciiva.com/6697/srr1210-6697613.pdf?src-supplier=Digi-Key, ComponentLink7Description=https://datasheet.ciiva.com/46437/1430851-46437357.pdf?src-supplier=Element14, ComponentLink7URL=https://datasheet.ciiva.com/46437/1430851-46437357.pdf?src-supplier=Element14, ComponentLink8Description=https://datasheet.ciiva.com/6697/srr1210-6697615.pdf?src-supplier=Digi-Key, ComponentLink8URL=https://datasheet.ciiva.com/6697/srr1210-6697615.pdf?src-supplier=Digi-Key, Core Material=Ferrite, DC Current=3A, Depth=12.5mm, Height=10mm, Height - Seated (Max)=0.394inch, Inductance=100uH, Length=12mm, Max DC Current=3A, Military Standard=Not, Mount="Surface Mount", Packaging="Tape and Reel", Pricing 1="1=1.27000, 10=1.18000, 25=1.08880, 50=0.90760, 100=0.85300 (USD)", Q Factor=12, REACH SVHC="No SVHC", RMS Current (Irms)=3A, RoHS=Yes, RoHS Compliant=Yes, Series=SRR1210, Shielding=Shielded, Supplier 1=Digi-Key, Termination=SMD/SMT, Tolerance=20%, Width=0.472inch
PJ1: library part DC_socket, "CONN PWR JACK 2.5X5.5MM SOLDER", Color=Black, Current Rating=2.5A, Flammability Rating="UL94 V-0", Insulation Resistance=100MR, Manufacturer=CUI, Manufacturer Part Number=PJ-102B, Max Operating Temperature=85°C, Min Operating Temperature=-25°C, Package Quantity=280, Supplier Part Number 1=CP-102B-ND, Voltage Rating=24V, Category=Connectors, ComponentLink1Description=http://www.mouser.com/ds/2/670/PJ-102B-524146.pdf?src-supplier=Mouser, ComponentLink1URL=http://www.mouser.com/ds/2/670/PJ-102B-524146.pdf?src-supplier=Mouser, ComponentLink2Description=http://www.cui.com/Product/Resource/FuturePDF/PJ-102B.pdf?src-supplier=Future+Electronics, ComponentLink2URL=http://www.cui.com/Product/Resource/FuturePDF/PJ-102B.pdf?src-supplier=Future+Electronics, ComponentLink3Description=https://www.cui.com/product/resource/digikeypdf/pj-102b.pdf?src-supplier=Digi-Key, ComponentLink3URL=https://www.cui.com/product/resource/digikeypdf/pj-102b.pdf?src-supplier=Digi-Key, Connector Type=Jack, Contact Gender=Male, Contact Material=Copper, Contact Plating=Nickel, Diameter=2.5mm, Gender=Male, Housing Color=Black, Housing Material=Thermoplastic, Lead Free="Lead Free", Mount="Through Hole", Number of Conductors=2, Orientation=Horizontal, Packaging=Bulk, Pricing 1="1=0,64000, 10=0,60000, 25=0,54000, 50=0,48000, 100=0,46000, 250=0,42000, 500=0,40000, 1000=0,33000, 2500=0,30000 (USD)", RoHS=Yes, Shielding=Unshielded, Stock 1=26389, Supplier 1=Digi-Key, Termination="Through Hole"
PS_left1: library part pin_socket_L_discovery, "Socket for STM32F407-discovery pinout"
PS_right1: library part pin_socket_R_discovery, "Socket for STM32F407-discovery pinout"
R1 R2 R3 R5 R6 R7 R8 R9 R12 R15 R16 R21 R25 R26 R27 R28: library part Res_0805_10kOhm, "Chip Resistor, 10 KOhm, +/- 1%, 0.125 W, -55 to 155 degC, 0805 (2012 Metric), RoHS, Tape and Reel", Manufacturer=Yageo, Max Operating Temperature="155 degC", Min Operating Temperature="-55 degC", Package Quantity=5000, Voltage Rating="150 V", ComponentLink1Description="Manufacturer URL", ComponentLink1URL=http://www.yageo.com/, ComponentLink2Description=Datasheet, ComponentLink2URL=http://www.yageo.com/documents/recent/PYu-RC_Group_51_RoHS_L_04.pdf, DatasheetVersion="Rev. 4, 02/2016", Height="0.5 mm", Length="2 mm", Mount="Surface Mount", Mounting Technology="Surface Mount", PackageDescription="2-Pin Surface Mounted Device, Body 2 x 1.25 mm", PackageReference=0805, Packaging="Tape and Reel", Pins=2, REACH SVHC="No SVHC", RoHSCompliant=true
R4 R13 R20 R24 R31: library part Res_0805_100Ohm, Manufacturer=Yageo, Part Number=RT0805DRD07100RL
R10 R11 R14 R22 R29 R32: library part Res_0805_4k7Ohm, "Chip Resistor in 0805 package"
R17 R23 R30 R33: library part Res_0805_620Ohm, "Res Thin Film 0805 620 Ohm 0.1% 0.125W(1/8W) ±25ppm/C Molded SMD Automotive Punched T/R", Case Code (Imperial)=0805, Case Code (Metric)=2012, Manufacturer=Panasonic, Manufacturer Part Number=ERA-6AEB621V, Max Operating Temperature=155°C, Max Power Dissipation=125mW, Min Operating Temperature=-55°C, Package Quantity=5000, Resistor Type="Thin Film", Supplier Part Number 1=P620DACT-ND, Temperature Coefficient=25ppm/°C, Tolerance=0.1%, Voltage Rating=100V, Case/Package=0805, Category="Chip SMD Resistors", ComponentLink1Description=https://datasheet.ciiva.com/29184/452957-da-01-en-widerstand-0805-era-29184095.pdf?src-supplier=Conrad, ComponentLink1URL=https://datasheet.ciiva.com/29184/452957-da-01-en-widerstand-0805-era-29184095.pdf?src-supplier=Conrad, ComponentLink2Description=https://datasheet.ciiva.com/5915/485442-5915222.pdf?src-supplier=Farnell, ComponentLink2URL=https://datasheet.ciiva.com/5915/485442-5915222.pdf?src-supplier=Farnell, ComponentLink3Description=https://datasheet.ciiva.com/5915/485442-5915223.pdf?src-supplier=Farnell, ComponentLink3URL=https://datasheet.ciiva.com/5915/485442-5915223.pdf?src-supplier=Farnell, ComponentLink4Description=https://datasheet.ciiva.com/5915/485442-5915224.pdf?src-supplier=Farnell, ComponentLink4URL=https://datasheet.ciiva.com/5915/485442-5915224.pdf?src-supplier=Farnell, ComponentLink5Description=https://datasheet.ciiva.com/22699/485442-22699418.pdf?src-supplier=Element14, ComponentLink5URL=https://datasheet.ciiva.com/22699/485442-22699418.pdf?src-supplier=Element14, ComponentLink6Description=https://datasheet.ciiva.com/9180/aoa0000ce26-9180731.pdf?src-supplier=Avnet, ComponentLink6URL=https://datasheet.ciiva.com/9180/aoa0000ce26-9180731.pdf?src-supplier=Avnet, ComponentLink7Description=https://datasheet.ciiva.com/30251/54aoa0000ce26-30251500.pdf?src-supplier=Onlinecomponents.com, ComponentLink7URL=https://datasheet.ciiva.com/30251/54aoa0000ce26-30251500.pdf?src-supplier=Onlinecomponents.com, ComponentLink8Description=https://datasheet.ciiva.com/48536/era-eng-tds-48536828.pdf?src-supplier=Distrelec, ComponentLink8URL=https://datasheet.ciiva.com/48536/era-eng-tds-48536828.pdf?src-supplier=Distrelec, Contact Plating=Tin, Depth=1.25mm, Features="Automotive AEC-Q200", Height=0.024inch, Lead Free="Lead Free", Length=2mm, Military Standard=Not, Mount="Surface Mount", Number of Pins=2, Number of Terminations=2, Packaging="Tape and Reel", Power Rating=125mW, Pricing 1="1=0,31000, 10=0,26200, 100=0,10230, 1000=0,04284, 2500=0,03927 (USD)", Radiation Hardening=No, REACH SVHC="No SVHC", Resistance=620R, RoHS=Yes, Stock 1=1336, Supplier 1=Digi-Key, Termination=SMD/SMT, Voltage Rating (DC)=100V, Weight=0.000194oz, Width=0.049inch
T1 T2 T3 T4: "Trans MOSFET N-CH 30V 5.7A 3-Pin SOT-23", Case/Package=SOT-23, Continuous Drain Current (ID)=5.7A, Drain to Source Voltage (Vdss)=30V, Gate to Source Voltage (Vgs)=12V, Input Capacitance=630pF, Manufacturer="Alpha & Omega Semiconductor", Manufacturer Part Number=AO3400A, Max Operating Temperature=150°C, Max Power Dissipation=1.4W, Min Operating Temperature=-55°C, Supplier Part Number 1=785-1000-1-ND, Category=MOSFETs, ComponentLink1Description=https://datasheet.ciiva.com/940/ao3400a-940739.pdf?src-supplier=Digi-Key, ComponentLink1URL=https://datasheet.ciiva.com/940/ao3400a-940739.pdf?src-supplier=Digi-Key, ComponentLink2Description=https://datasheet.ciiva.com/26906/getdatasheetpartid-64438-26906526.pdf?src-supplier=Verical, ComponentLink2URL=https://datasheet.ciiva.com/26906/getdatasheetpartid-64438-26906526.pdf?src-supplier=Verical, ComponentLink3Description=https://datasheet.ciiva.com/940/ao3400a-940740.pdf?src-supplier=Digi-Key, ComponentLink3URL=https://datasheet.ciiva.com/940/ao3400a-940740.pdf?src-supplier=Digi-Key, ComponentLink4Description=https://datasheet.ciiva.com/940/ao3400a-940741.pdf?src-supplier=Digi-Key, ComponentLink4URL=https://datasheet.ciiva.com/940/ao3400a-940741.pdf?src-supplier=Digi-Key, Lead Free="Lead Free", Mount="Surface Mount", Number of Elements=1, Number of Pins=3, Packaging="Tape and Reel", Power Dissipation=1.4W, Pricing 1="1=0,36000, 10=0,27500, 25=0,24760, 100=0,13050, 500=0,11566, 1000=0,09000 (USD)", Radiation Hardening=No, Rds On Max=26.5mR, RoHS=Yes, Supplier 1=Digi-Key
U1: library part EEPROM_1Kbit, "1Kbit, 400kHz, 1.8V, I2C Serial EEPROM, 8-Pin SOIC 150mil, Industrial Temperature", Code_IPC=SOIC127P600-8, Code_JEDEC=MS-012, DatasheetVersion="revJ, Jan-2009", PackageDescription="8-Lead Plastic Small Outline (SN) - Narrow, 3.90mm Body [SOIC]", PackageReference=SOIC-SN8, PackageVersion="revBB, Aug-2009"
U2: library part AD8040ARZ, "Quad Channel RRIO Operational Amplifier, 125 MHz BW, 62 V/us SR, Industrial, 14-pin SOIC (R-14), Tube", Amplifiers Per Package=4, Input Bias Current=700nA, Input Offset Voltage=1.6mV, Manufacturer="Analog Devices", Code_JEDEC=MS-012-AB, ComponentLink1Description="Manufacturer URL", ComponentLink1URL=http://www.analog.com/en/index.html, ComponentLink2Description=Datasheet, ComponentLink2URL=http://www.analog.com/static/imported-files/data_sheets/AD8029_8030_8040.pdf, ComponentLink3Description="Package Specification", ComponentLink3URL=http://www.analog.com/static/imported-files/packages/PKG_PDF/SOIC_Narrow%20(R)/R_14.pdf, DatasheetVersion="Rev. B", Generic Part Number=AD8040, Iq/Amp=1.5mA, Mounting Technology="Surface Mount", PackageDescription="14-Pin Standard Small Outline Package, Body 8.65 x 3.9 mm, Pitch 1.27 mm", PackageReference=R-14, PackageVersion=060606-A, PartNumber=AD8040ARZ, Slew Rate=62V/us, Small Signal Bandwidth=125MHz, V Span Max=12V, V Span Min=2.7V

## Free pads (board coordinates)
  oval 3.5x3 hole 2.5 unplated: M(38.075,3) M(38.075,97.2) M(177.25,3) M(177.25,97.2)

## Via types
v1: diameter 1, hole 0.5, Top Ground to Bottom Ground, 70 vias
v2: diameter 4, hole 3, Top Ground to Bottom Ground, 8 vias

## Nets (pads, with @x,y where several pads share a name; then routed paths per layer and width w, separated by ;. In a path a pad name is that pad's centre, name@x,y a point inside that pad or via, vN(x,y) a via of type N, cw(c..) or ccw(c..) an arc to the next point about the centre after c; other vN are vias at no path point)
3V: PS_right1.5 PS_right1.6 R2.2 R6.2 R9.2 R16.2 U1.8 | length 125
  Top Ground w0.254: v1(56.964,78.216) 57.107,78.359 57.78,78.359 57.881,78.46 58.316,78.025 58.955,78.025 59.232,78.302 60.377,78.302 R16.2 61.125,79.05 62.7,79.05 ; v1(67.5,75) 65.529,76.971 64.779,76.971 62.7,79.05 ; R2.2 107.471,78.775 107.004,79.242 100.983,79.242 100.516,78.775 R6.2 91.471,78.775 91.365,78.881 77.144,78.881 R9.2 62.7,79.05
  Top Ground w0.5: v1(57,52.75) 57.01,52.74 57.01,49.96 U1.8
  Bottom Ground w0.254: v1(56.964,78.216) 56.982,78.198 56.982,52.768 v1(57,52.75) ; v1(67.5,75) 67.631,75.131 69.126,75.131 69.42,75.425 70.713,75.425 86.014,60.124 88.153,60.124 88.339,60.31 89.095,60.31 89.281,60.124 90.239,60.124 90.49,60.375 90.75,60.375 91.144,60.769 91.144,62.664 PS_right1.6 PS_right1.5
5V: C1.2 C2.1 C3.1 C18.1 D1.2 H3.6 H6.3 L.1 PJ1.1 PS_right1.3 PS_right1.4 R1.2 R5.2 R8.2 R10.1 R11.1 R15.2 | length 216
  Top Ground w0.5: H3.6 44.868,44 42.75,44 ; R10.1 R11.1 51.625,35.985 51.625,35.125 51.25,34.75 50.543,34.75 50.25,34.457 50.25,33.07 C3.1 C2.1 C1.2 50.125,26.04 49.625,25.54 49.615,25.54 46.95,22.875 PJ1.1 46.75,22.575 43.325,26 D1.2 43.325,29.225 42.666,29.884 42.666,43.916 42.75,44 ; v1(95.25,72.75) 94,72.75 93.925,72.675 93.525,72.675 R5.2 93.169,72.319 91.739,72.319 91.166,71.746 87.492,71.746 86.638,72.6 80.98,72.6 ; v1(107.25,71) 107.346,71.096 107.346,71.596 108.037,72.287 109.288,72.287 R1.2 ; L.1 113.5,18.7 107.545,24.655 C18.1 103.095,24.5 98,24.5 90.25,32.25 90.25,60.506 89.76,60.996 PS_right1.4 80.98,72.6 ; 42.75,44 42.7,44.05 H6.3 40.275,59.725 40.275,63.225 48.902,71.852 60.377,71.852 R15.2 61.179,71.996 76.246,71.996 76.85,72.6 R8.2 80.98,72.6
  Bottom Ground w0.254: v1(95.25,72.75) 95.946,72.054 95.946,71.554 96.5,71 v1(107.25,71)
+5V_filtr: C10.2 C11.2 C19.1 C20.1 L.2 U2.4 | length 42.9
  Top Ground w0.5: L.2 121.725,28.8 123.425,27.1 C19.1 129.775,27.1 130.1,27.425 130.1,27.475 130.425,27.8 130.625,27.8 131.375,28.55 C10.2 C11.2 144.125,28.55 v1(151.35,35.775)
  Bottom Ground w0.5: v1(151.35,35.775) U2.4
GND: C1.1 C7.1 C8.1 C9.1 C10.1 C11.1 C13.1 C14.1 C15.1 C16.1 C17.1 C18.2 C19.2 C20.2 H1.3 H1.4 H2.3 H2.4 H3.1 H4.3 H5.3 H5.4 H6.4 H7.3 H7.4 H8.3 H8.4 H9.3 H9.4 H10.3 H10.4 H11.3 H11.4 J1.1 J1.MH1 J1.MH2 J2.1 J2.MH1 J2.MH2 J3.1 J3.MH1 J3.MH2 J8.1 J8.MH1 J8.MH2 pad.M PJ1.2 PJ1.3 PS_left1.1 PS_left1.2 PS_left1.5 PS_left1.23 PS_left1.49 PS_left1.50 PS_right1.1 PS_right1.2 PS_right1.49 PS_right1.50 R3.1 R4.2 R7.1 R12.1 R14.1 R17.1 R21.1 R22.1 R23.1 R29.1 R30.1 R32.1 R33.1 T1.2 T2.2 T3.2 T4.2 U1.1 U1.2 U1.3 U1.4 U1.7 U2.11 | length 801.7
  Top Ground w0.254: C1.1 C1.1@51.925,26.09 ; R4.2 R4.2@51.975,22.7 ; v1@53.5,24.225 v1(53.5,24.25) ; v1@53.5,27.665 v1(53.5,27.75) ; v1(146,35.75) 146.142,35.608 149.104,35.608 152.177,38.681 152.177,39.708 155.25,42.781 v1(155.25,44.25) ; v1(148,25.75) 148,25.82 148.588,26.408 148.588,26.588 149.5,27.5 v1(155.25,27.5)
  Top Ground w0.5: C1.1@51.925,26.09 v1@53.5,27.665 ; R4.2@51.975,22.7 v1@53.5,24.225 ; v1(54.25,78.25) 54.312,78.188 54.312,76.737 R21.1 ; v1(55.5,45) 56.928,45 56.938,45.01 56.938,45.05 U1.1 U1.2 U1.3 U1.4 ; U1.7 58.29,52.405 58.5,52.615 v1(58.5,52.75) ; T4.2 58.47,74.452 58.47,73.03 v1(58.5,73) ; v1(68.75,76.5) 68.885,76.5 69.06,76.675 R12.1 ; v1(74.5,73) 74.545,73.045 74.545,74.437 T3.2 ; v1(84.75,76.5) 84.885,76.5 85.06,76.675 R7.1 ; T2.2 90.745,74.355 90.745,72.755 v1(90.75,72.75) ; v1(100.75,76.75) 100.787,76.712 102.688,76.712 R3.1 ; C18.2 103.25,26.655 103.575,26.33 112.522,26.33 113.953,24.9 C19.2 125.675,25.075 C20.2 ; v1@106.768,73.153 106.768,74.238 T1.2 ; v1(128.25,22.5) 128.346,22.596 128.346,23.121 130.1,24.875 C20.2 ; v1(141.75,26.75) C11.1 C10.1 133.138,26.75 131.988,25.6 130.425,25.6 130.1,25.275 C20.2
  Bottom Ground w0.254: PS_right1.1 PS_right1.2 ; PS_left1.23 115.408,10.728 116.313,10.728 117.221,11.636 117.951,11.636 118.856,12.541 118.856,13.271 v1@127.835,22.25 ; 144.031,15.28 142.019,17.292 142.019,21.769 146.25,26 146.899,26 147.119,25.78 147.97,25.78 v1(148,25.75) 148,27.475 R29.1 ; v1(146,35.75) 146.013,35.763 148.388,35.763 U2.11 ; PS_left1.49 PS_left1.50 ; PS_right1.49 PS_right1.50 ; R22.1 153.475,27.5 v1(155.25,27.5)
  Bottom Ground w0.5: pad.M@38.075,3 38.075,12 43.15,17.075 43.15,17.375 PJ1.3@43.65,17.875 ; pad.M@38.075,97.2 42.775,92.5 H7.4 ; H6.4 40.7,59.3 H4.3 42.916,61.3 43.222,60.994 43.374,60.994 44.222,60.146 48.987,60.146 49.28,60.439 49.28,79.22 ; PJ1.2 40.95,20.575 PJ1.3@43.65,17.875 ; H3.1 49.396,36.933 53.5,32.828 ; v1(54.25,78.25) 54.25,79.22 ; H5.3@57.25,89.25 H5.4@57.25,92.25 ; v1(58.5,73) 59.5,73 ; v1(68.75,76.5) 68.125,77.125 ; H2.3@69.75,89.5 H2.4@69.75,92.5 ; v1(74.5,73) 75.768,73 ; H1.3@83,89.25 83,92.25 78.234,92.25 76.63,93.854 71.104,93.854 H2.4@69.75,92.5 ; v1(84.75,76.5) 84.75,74.5 85,74.25 ; PS_left1.2 PS_left1.1 88.499,9.201 91.021,9.201 PS_left1.5 94.636,8.144 112.936,8.144 115.16,10.368 PS_left1.23 ; PS_right1.2 83,68.04 83,70.5 ; v1@90.71,72.846 91,73.135 91,73.191 95.584,77.775 100.75,77.775 ; v1(90.75,72.75) 89.25,74.25 85,74.25 ; v1(100.75,76.75) 100.75,77.775 ; C8.1 C7.1 126.125,87.103 H9.3 H9.4 ; C15.1 C9.1 139.063,87.149 H10.3 H10.4 ; R32.1 141.937,39.462 141.937,37.063 R33.1 142,35.625 ; v1(146,35.75) 143.995,35.75 143.87,35.625 142,35.625 ; PS_left1.50 145.969,15.231 141.906,15.231 139.896,17.241 139.896,23.094 141.75,24.948 v1(141.75,26.75) 141.75,34 R30.1 142,35.625 ; R14.1 153.263,44.238 155.238,44.238 v1(155.25,44.25) 159.932,44.25 160.25,43.932 160.25,39.175 R17.1 R23.1 162.485,34.525 J3.1 165.96,35.46 J3.MH1 ; J2.1 165.96,54.575 J2.MH1 ; pad.M@177.25,3 174.245,3 J8.MH2 J8.MH1 165.96,16.365 J8.1 163.42,22.76 J3.MH2 J3.MH1 ; pad.M@177.25,97.2 168.5,88.45 J1.MH1 ; PJ1.3@43.65,17.875 PJ1.3 49.375,17.875 53.5,22 v1(53.5,24.25) v1(53.5,27.75) 53.5,32.828 ; H7.4 45.854,93.854 51.13,93.854 52.734,92.25 H5.4@57.25,92.25 ; H7.4 H7.3 44.5,84 49.28,79.22 ; 49.28,79.22 54.25,79.22 ; 53.5,32.828 53.5,41.53 55.5,43.53 v1(55.5,45) 58.5,48 v1(58.5,52.75) 58.5,67.5 59.5,68.5 ; 54.25,79.22 57.364,79.22 59.343,77.346 59.348,77.341 59.352,77.336 59.478,77.211 59.5,77 59.5,73 ; H5.4@57.25,92.25 59.25,94.25 63.359,94.25 65.109,92.5 H2.4@69.75,92.5 ; 59.5,68.5 68.125,77.125 ; 59.5,68.5 59.5,73 ; 68.125,77.125 71,80 75.432,80 75.725,79.707 75.725,73.543 76.018,73.25 75.768,73 ; 75.768,73 80.5,73 83,70.5 ; 83,70.5 83,72.25 85,74.25 ; 100.75,77.775 103.975,77.775 104.5,77.25 104.5,74.877 106.5,72.877 v1(106.5,72.75) 107.804,74.054 107.804,74.291 109.013,75.5 110.75,75.5 111.25,76 111.25,81.192 113.533,83.475 C14.1 C13.1 113.188,87.057 H8.3 H8.4 114.542,93.854 120.036,93.854 121.39,92.5 H9.4 ; H9.4 127.479,93.854 132.974,93.854 134.328,92.5 H10.4 ; H10.4 140.417,93.854 150.646,93.854 H11.4 H11.3 152,87.195 C16.1 C17.1 152.483,83.475 148.18,79.172 PS_right1.50 158.05,73.69 J1.1 165.96,76.23 J1.MH1 ; J3.MH1 J2.MH2 J2.MH1 ; J2.MH1 J1.MH2 J1.MH1
I2C_SCL: H3.2 H6.2 PS_right1.17 R11.2 U1.6 | length 99.7
  Top Ground w0.254: H6.2 53.681,48.319 58.829,48.319 U1.6@59.56,49.05 ; H3.2 47.453,36.335 R11.2 ; U1.6 U1.6@59.56,49.05 ; v1(63.25,50.75) 63.107,50.607 63.107,50.293 61.133,48.319 60.291,48.319 U1.6@59.56,49.05
  Bottom Ground w0.254: H6.2 42.967,55.567 42.967,40.821 H3.2 ; v1(63.25,50.75) 67.5,55 101.26,55 PS_right1.17
I2C_SDA: H3.4 H6.1 PS_right1.18 R10.2 U1.5 | length 100.2